# Altium PCB PCB.PcbDoc
Units mm, origin at the board's own origin, x right, y up, seen from the top; angles counter-clockwise.
Board outline 100 x 100 mm, 6 copper layers (Top Layer, Int1 (GND), Int2 (SIG), Int3 (SIG), Int4 (PWR), Bottom Layer), stack 1.51 mm thick; 51 components, 25 nets, 186 pads, 1 vias.
Unrouted connection lines stored in the file: 2.
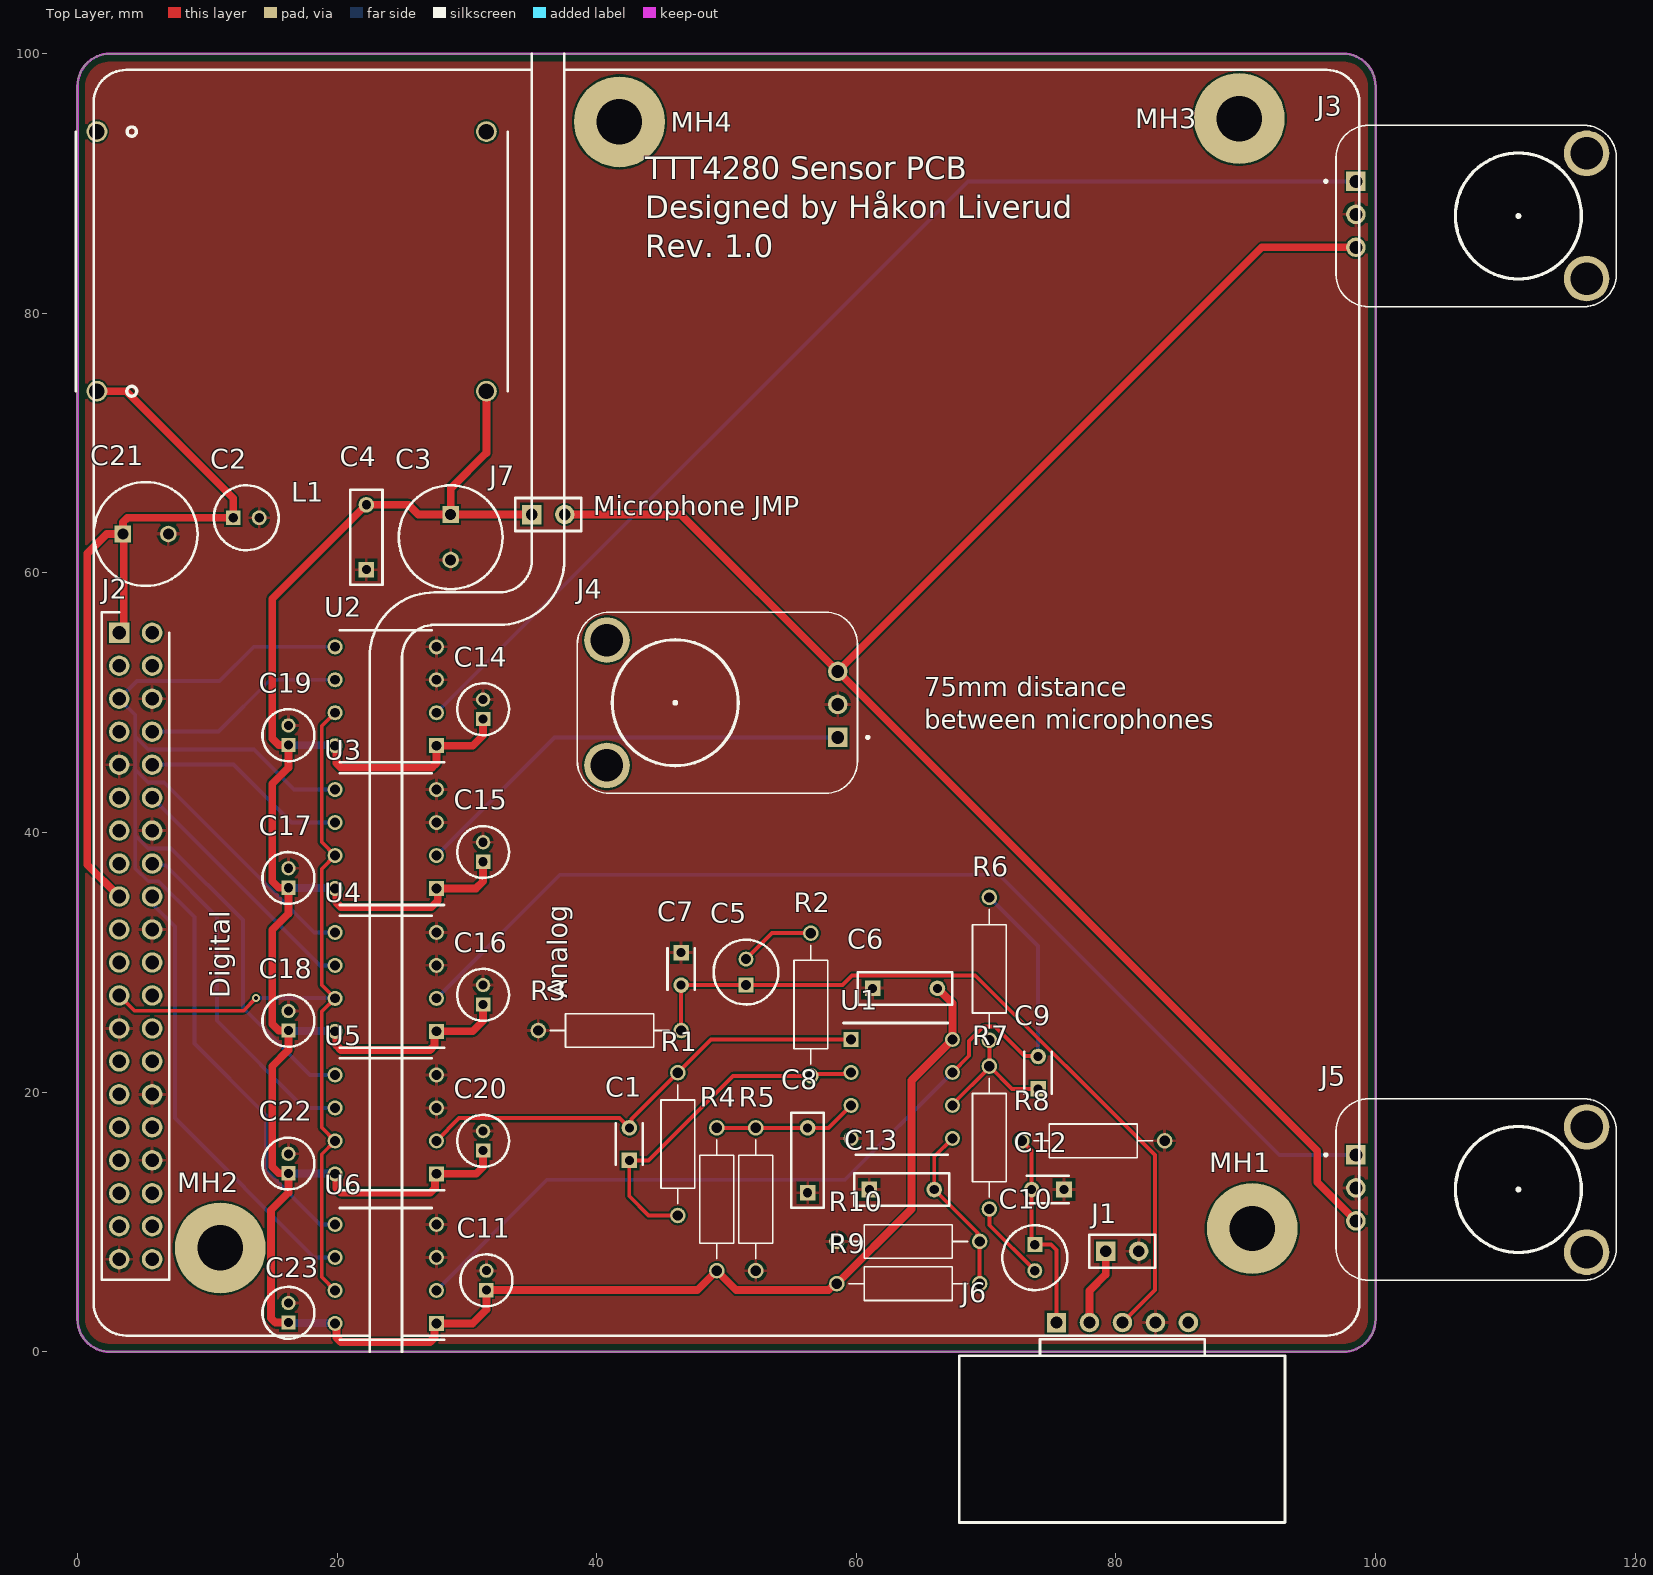
[diagram p0: Top Layer view]
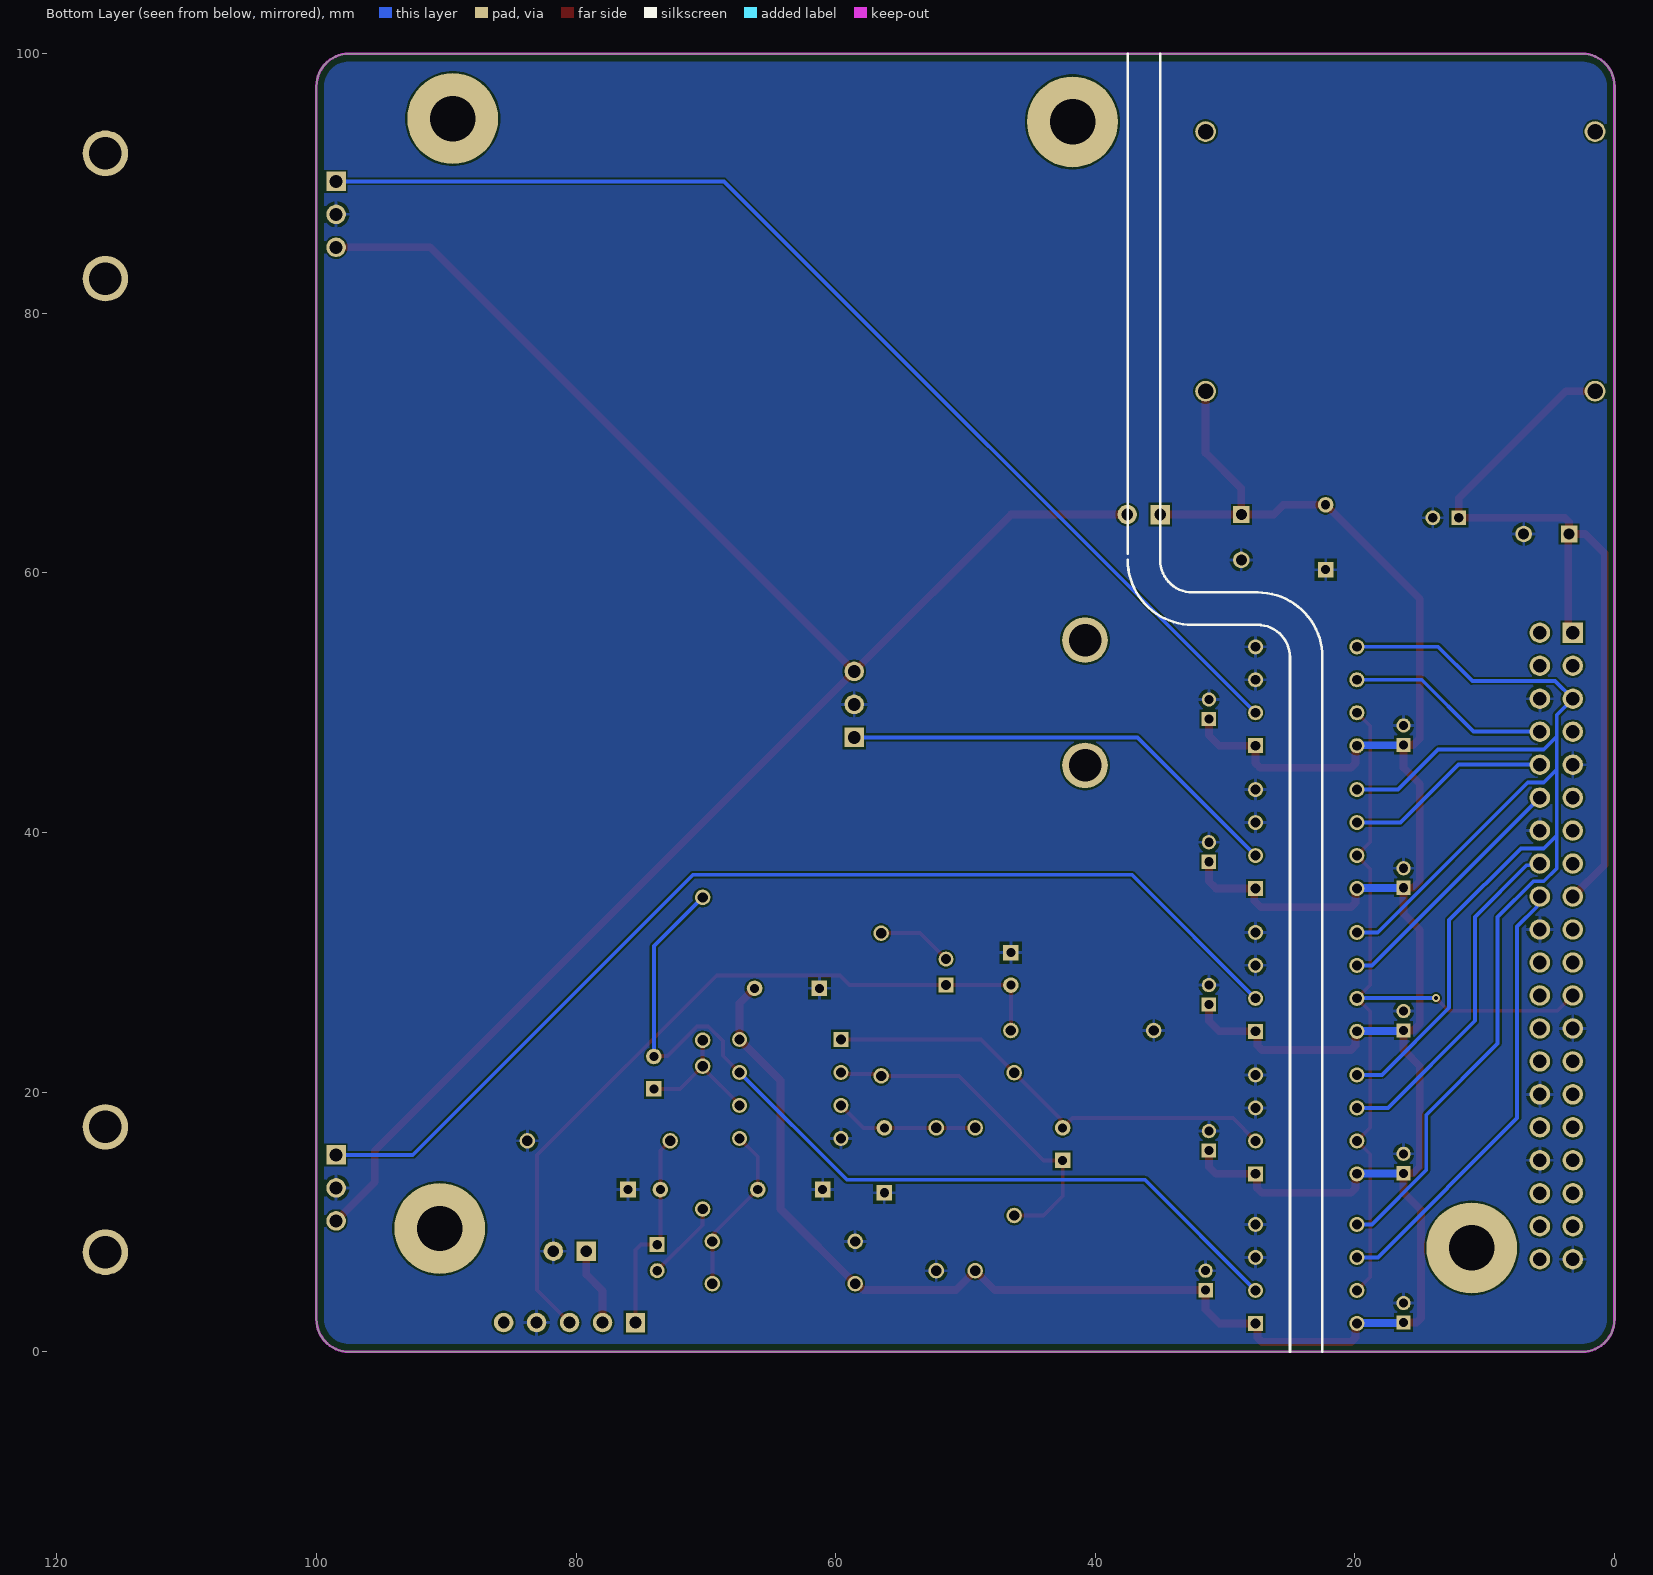
[diagram p1: Bottom Layer view, seen from below]
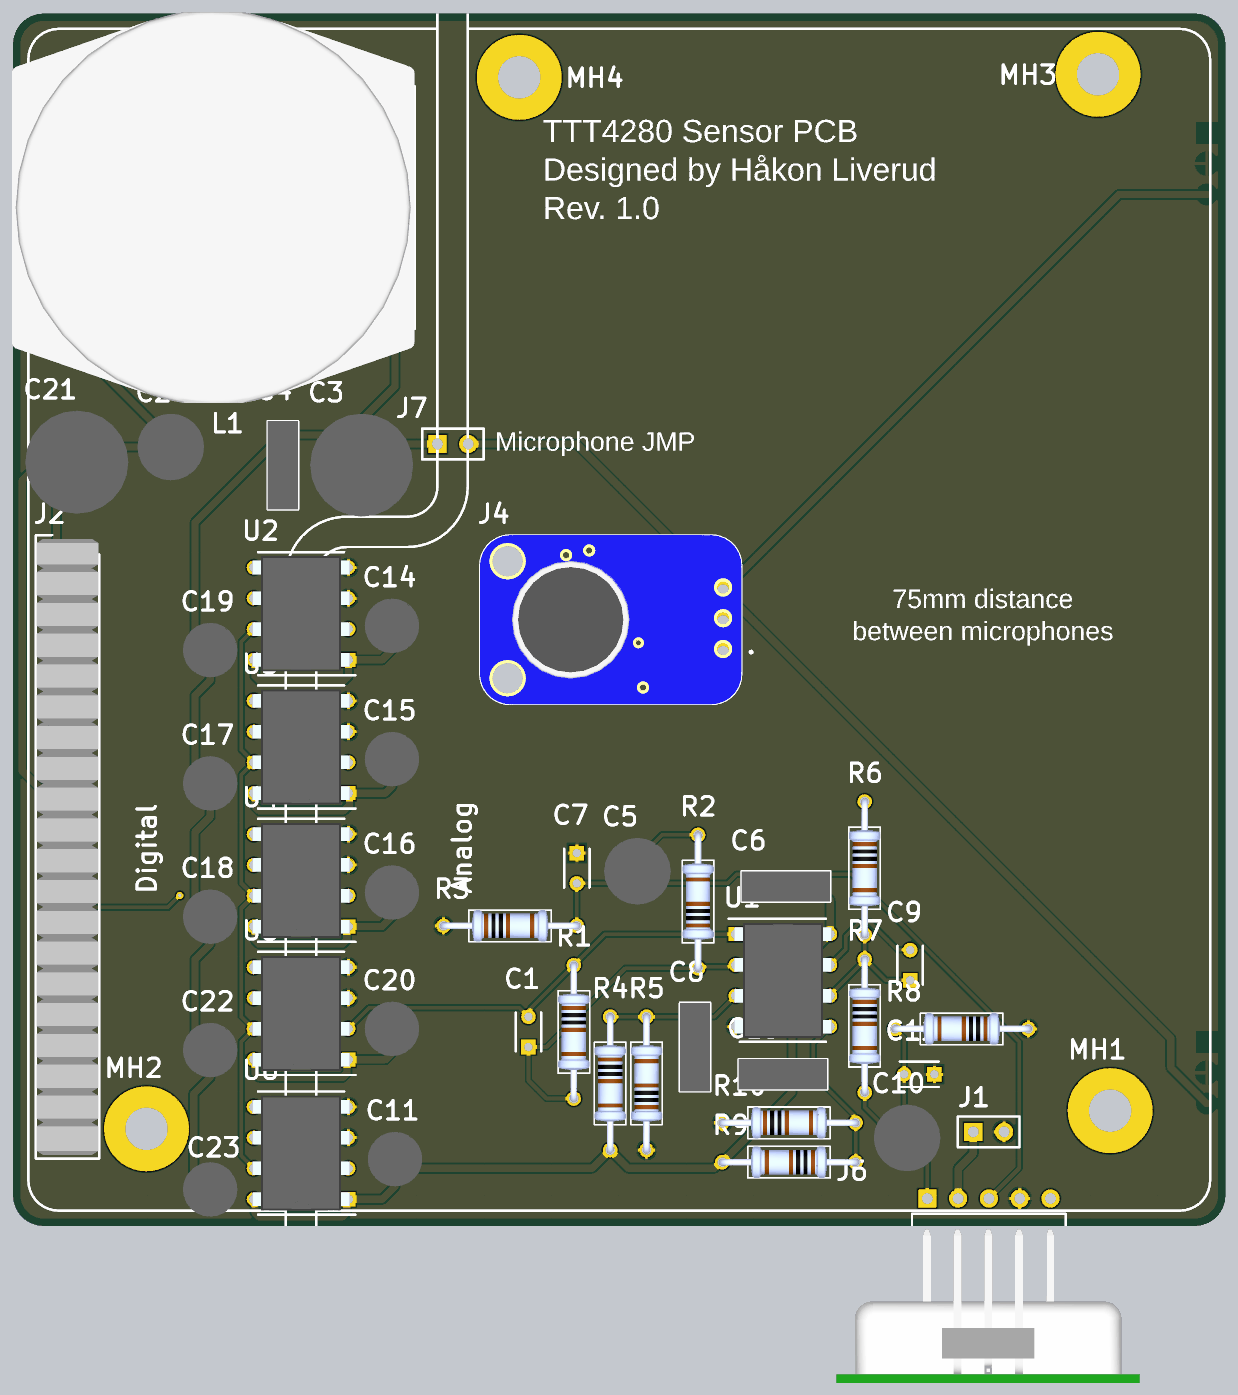
[diagram p2: 3D render of the assembled board from above, using the file's embedded part models]

## Layer stack, top to bottom
Top Solder: solder mask 0.0254, SM-001, Dk 4
Top Layer: signal copper 0.035
Dielectric 2: prepreg 0.24, PP-006, Dk 4.1
Int1 (GND): signal copper 0.035
Dielectric 3: core 0.33, Core-035, Dk 4.7
Int2 (SIG): signal copper 0.035
Dielectric 4: prepreg 0.16, PP-006, Dk 4.1
Int3 (SIG): signal copper 0.035
Dielectric 6: core 0.33, Core-035, Dk 4.7
Int4 (PWR): signal copper 0.035
Dielectric 7: prepreg 0.24, PP-006, Dk 4.1
Bottom Layer: signal copper 0.035
Bottom Solder: solder mask 0.0254, SM-001, Dk 4

## Board outline
0,2.5 0,97.5 cw(c2.5,97.5) 2.5,100 97.5,100 cw(c97.5,97.5) 100,97.5 100,2.5 cw(c97.5,2.5) 97.5,0 2.5,0 cw(c2.5,2.5)

## Design rules (kind name [scope] priority, off if disabled: settings)
BoardOutlineClearance [Not (OnLayer('Top Overlay') Or OnLayer('Bottom Overlay'))] p1: gap=0.6 ignorepadtopadclearanceinfootprint=FALSE except(0: Arc-SplitContinuation Track-SplitContinuation SMDPad-SplitContinuation THPad-SplitContinuation Via-SplitContinuation Fill-SplitContinuation Poly-SplitContinuation Region-SplitContinuation Text-OutlineEdge Text-CavityEdge Text-CutoutEdge Text-SplitBarrior Text-SplitContinuation)
Clearance [All] p1: gap=0.15 ignorepadtopadclearanceinfootprint=FALSE except(0: Arc-Hole Track-Hole SMDPad-Hole THPad-Hole Via-Hole Fill-Hole Poly-Hole Region-Hole Text-Hole)
DiffPairsRouting DiffPairsRouting_1 [(InNet('CAN0L') OR InNet('CAN0H'))] p1: maxlimit=0.254 minlimit=0.254 mostfreqgap=0.254 toplayer_minwidth=0.381 toplayer_maxwidth=0.381 toplayer_prefwidth=0.381 midlayer1_minwidth=0.381 midlayer1_maxwidth=0.381 midlayer1_prefwidth=0.381 midlayer2_minwidth=0.381 midlayer2_maxwidth=0.381 midlayer2_prefwidth=0.381 midlayer3_minwidth=0.381 midlayer3_maxwidth=0.381 midlayer3_prefwidth=0.381 midlayer4_minwidth=0.381 midlayer4_maxwidth=0.381 midlayer4_prefwidth=0.381 bottomlayer_minwidth=0.381 bottomlayer_maxwidth=0.381 bottomlayer_prefwidth=0.381 maxuncoupledlength=12.7
DiffPairsRouting [All] p2: maxlimit=0.254 minlimit=0.15 mostfreqgap=0.2 toplayer_minwidth=0.15 toplayer_maxwidth=1 toplayer_prefwidth=0.2 midlayer1_minwidth=0.15 midlayer1_maxwidth=1 midlayer1_prefwidth=0.2 midlayer2_minwidth=0.15 midlayer2_maxwidth=1 midlayer2_prefwidth=0.2 midlayer3_minwidth=0.15 midlayer3_maxwidth=1 midlayer3_prefwidth=0.2 midlayer4_minwidth=0.15 midlayer4_maxwidth=1 midlayer4_prefwidth=0.2 bottomlayer_minwidth=0.15 bottomlayer_maxwidth=1 bottomlayer_prefwidth=0.2 maxuncoupledlength=12.7
Height [All] p1: minheight=0 maxheight=40 prefheight=12.7
HoleSize [All] p1: absolutevalues=TRUE maxlimit=5.5 minlimit=0.3 maxpercent=80.000 minpercent=20.000
MinimumSolderMaskSliver [All] p1: minsoldermaskwidth=0.1
PolygonConnect [All] p1: connectstyle=Relief reliefconductorwidth=0.254 reliefentries=4 polygonreliefangle="90 Angle" airgapwidth=0.254
RoutingVias [All] p1: holewidth=0.35 width=0.65 viastyle="Through Hole" minholewidth=0.3 minwidth=0.6 maxholewidth=0.7 maxwidth=1.5
SilkToSilkClearance [All] p1: silktosilkclearance=0.07
SolderMaskExpansion [All] p1: expansion=0.1 istentingtop=FALSE
Width [All] p1: maxlimit=5 minlimit=0.15 preferedwidth=0.2 checkconnectedcopper=TRUE
25 further rules are at their usual default settings.

## Components (designator, comment, footprint, x,y, rotation, side; value= is the part's Value field where it differs from the comment)
C1 "???" "CTHT Ceramic" 42.51,14.75 r90 top value=1nF
C2 "100uF" "CTHT 5MM" 12,64.25 r0 top
C3 "470uF" "CTHT 8mm" 28.75,64.5 r270 top
C4 "100nF" "C TDK Film 7.3x2.5x6.5mm" 22.25,60.25 r90 top value=0.1uF
C5 "???" "CTHT 5MM" 51.5,28.25 r90 top
C6 "100nF" "C TDK Film 7.3x2.5x6.5mm" 61.25,28 r0 top value=0.1uF
C7 "1nF" "CTHT Ceramic" 46.5,30.75 r270 top
C8 "100nF" "C TDK Film 7.3x2.5x6.5mm" 56.25,12.25 r90 top value=0.1uF
C9 "???" "CTHT Ceramic" 74,20.25 r90 top value=1nF
C10 "???" "CTHT 5MM" 73.75,8.25 r270 top
C11 "1uF" "CTHT 4MM" 31.5,4.75 r90 top
C12 "1nF" "CTHT Ceramic" 76,12.5 r180 top
C13 "100nF" "C TDK Film 7.3x2.5x6.5mm" 61,12.5 r0 top value=0.1uF
C14 "1uF" "CTHT 4MM" 31.25,48.75 r90 top
C15 "1uF" "CTHT 4MM" 31.25,37.75 r90 top
C16 "1uF" "CTHT 4MM" 31.25,26.75 r90 top
C17 "10uF" "CTHT 4MM" 16.25,35.75 r90 top
C18 "10uF" "CTHT 4MM" 16.25,24.75 r90 top
C19 "10uF" "CTHT 4MM" 16.25,46.75 r90 top
C20 "1uF" "CTHT 4MM" 31.25,15.5 r90 top
C21 "470uF" "CTHT 8mm" 3.5,63 r0 top
C22 "10uF" "CTHT 4MM" 16.25,13.75 r90 top
C23 "10uF" "CTHT 4MM" 16.25,2.25 r90 top
J1 "Header 2" HDR1X2 79.21,7.75 r0 top
J2 "2x20 Header RPI4" HDRV40W87P254_2X20_5093X508X1067P 3.21,55.39 r270 top
J3 "Adafruit MAX4466" MODULE_1063 111,87.5 r270 top
J4 "Adafruit MAX4466" MODULE_1063 46.048,50 r90 top
J5 "Adafruit MAX4466" MODULE_1063 111,12.5 r270 top
J6 "K-LC6" K-LC6 75.42,2.25 r0 top
J7 "Microphone Power Jumper" HDR1X2 35,64.5 r0 top
L1 "100mH Inductor" DKFP-G22G-D5J0 16.5,84 r270 top
MH1 "MountingHole" MountingHole 90.5,9.5 r180 top
MH2 "MountingHole" MountingHole 11,8 r180 top
MH3 "MountingHole" MountingHole 89.5,95 r180 top
MH4 "MountingHole" MountingHole 41.75,94.75 r180 top
R1 "???" RTHT 46.25,16 r270 top value=1K
R2 "???" RTHT 56.5,26.75 r90 top value=1K
R3 "1k" RTHT 41,24.75 r0 top value=1K
R4 "???" RTHT 49.25,11.75 r270 top value=1K
R5 "10k-50k" RTHT 52.25,11.75 r90 top value=1K
R6 "???" RTHT 70.25,29.5 r270 top value=1K
R7 "???" RTHT 70.25,16.5 r270 top value=1K
R8 "1k" RTHT 78.25,16.25 r180 top value=1K
R9 "???" RTHT 64,5.25 r180 top value=1K
R10 "10k-50k" RTHT 64,8.5 r0 top value=1K
U1 "MCP6002" DIP781W56P254L950H533Q8N 63.5,20.25 r0 top
U2 "MCP3201" DIP781W56P254L950H533Q8N 23.75,50.5 r180 top
U3 "MCP3201" DIP781W56P254L950H533Q8N 23.75,39.5 r180 top
U4 "MCP3201" DIP781W56P254L950H533Q8N 23.75,28.5 r180 top
U5 "MCP3201" DIP781W56P254L950H533Q8N 23.75,17.52 r180 top
U6 "MCP3201" DIP781W56P254L950H533Q8N 23.75,6 r180 top

## Footprints (in the part's own frame and the unit in brackets; to place one, negate y for a bottom-side part, rotate by r counter-clockwise, add the part's x,y. Pads: shape width x height; smd on the part's side, far side on the other; paste and mask are expansions set on the pad)
"C TDK Film 7.3x2.5x6.5mm" [mm]
  rect 1.2x1.2 hole 0.7: 1(0,0)
  round 1.2 hole 0.7: 2(5,0)
  silkscreen extent -1.15,-1.25 6.15,1.25, body extent -1.15,-1.25 6.15,1.25, height 6.6
"CTHT 4MM" [mm]
  rect 1.1x1.1 hole 0.7: 1(0,0)
  round 1.1 hole 0.7: 2(1.5,0)
  silkscreen extent -1.25,-2 2.75,2, body extent -1.5,-2.24 3,2.24, height 8
"CTHT 5MM" [mm]
  rect 1.15x1.15 hole 0.75: 1(0,0)
  round 1.15 hole 0.75: 2(2,0)
  silkscreen extent -1.5,-2.5 3.5,2.5, body extent -1.74,-2.75 3.75,2.75, height 12
"CTHT 8mm" [mm]
  rect 1.275x1.275 hole 0.85: 1(0,0)
  round 1.275 hole 0.85: 2(3.5,0)
  silkscreen extent -2.25,-4 5.75,4, body extent -2.49,-4.25 6,4.25, height 12.5
"CTHT Ceramic" [mm]
  rect 1.2x1.2 hole 0.7: 1(0,0)
  round 1.2 hole 0.7: 2(2.5,0)
  silkscreen extent -0.35,-1.05 2.85,1.05, body extent -1.1,-1.25 3.6,1.25, height 7.35
DIP781W56P254L950H533Q8N [mm]
  rect 1.159x1.159 hole 0.759: 1(-3.905,3.81)
  round 1.159 hole 0.759: 2(-3.905,1.27) 3(-3.905,-1.27) 4(-3.905,-3.81) 5(3.905,-3.81) 6(3.905,-1.27) 7(3.905,1.27) 8(3.905,3.81)
  silkscreen extent -4.48,-5.08 3.56,5.08, body extent -4.05,-4.75 4.05,4.75, height 5.33
DKFP-G22G-D5J0 [mm]
  round 1.6 hole 1.2: 1(10,-15) 2(10,15) 3(-10,-15) 4(-10,15)
  silkscreen extent -10.36,-16.64 10.38,16.64, body extent -16.1,-16.6 16.1,16.6, height 16.8
HDR1X2 [mm] "Connector; Header; 2 Position"
  rect 1.5x1.5 hole 0.9: 1(0,0)
  round 1.5 hole 0.9: 2(2.54,0)
  silkscreen extent -1.27,-1.27 3.81,1.27
HDRV40W87P254_2X20_5093X508X1067P [mm]
  rect 1.575x1.575 hole 1.05: 1(0,0)
  round 1.575 hole 1.05: 2(0,2.54) 3(2.54,0) 4(2.54,2.54) 5(5.08,0) 6(5.08,2.54) 7(7.62,0) 8(7.62,2.54) 9(10.16,0) 10(10.16,2.54) 11(12.7,0) 12(12.7,2.54) 13(15.24,0) 14(15.24,2.54) 15(17.78,0) 16(17.78,2.54) 17(20.32,0) 18(20.32,2.54) 19(22.86,0) 20(22.86,2.54) 21(25.4,0) 22(25.4,2.54) 23(27.94,0) 24(27.94,2.54) 25(30.48,0) 26(30.48,2.54) 27(33.02,0) 28(33.02,2.54) 29(35.56,0) 30(35.56,2.54) 31(38.1,0) 32(38.1,2.54) 33(40.64,0) 34(40.64,2.54) 35(43.18,0) 36(43.18,2.54) 37(45.72,0) 38(45.72,2.54) 39(48.26,0) 40(48.26,2.54)
  silkscreen extent -1.59,-1.34 49.85,3.88, body extent -1.27,-1.27 49.53,3.81, height 10.32
K-LC6 [mm] "Radar 5 pin"
  rect 1.5x1.5 hole 0.9: 1(0,0)
  round 1.5 hole 0.9: 2(2.54,0) 3(5.08,0) 4(7.62,0) 5(10.16,0)
  silkscreen extent -7.5,-15.4 17.6,-1.27, body extent -7.5,-15.24 17.52,-2.55, height 65.35
MODULE_1063 [mm]
  rect 1.508x1.508 hole 1: 1(-2.667,-12.521)
  round 1.508 hole 1: 2(-0.127,-12.521) 3(2.413,-12.521)
  round 3.516 hole 2.5: S1(-4.826,5.259) S2(4.826,5.259)
  silkscreen extent -6.99,-14.93 6.99,7.54, body extent -6.99,-14.05 6.99,7.54, height 9.14
MountingHole [mm]
  round 7 hole 3.5: 1(0,0)
RTHT [mm]
  round 1.2 hole 0.8: 1(-5.5,0) 2(5.5,0)
  silkscreen extent -4.58,-1.3 4.58,1.3, body extent -5.77,-1.29 5.77,1.29, height 2.6

## Part data
C1 C7 C9 C12: library part "1nF Ceramic", "1nF Ceramic Cap"
C2 C5 C10: library part "100uF 5mm THT", "100uF 5mm THT Cap"
C3: library part "470uF 8mm THT", "0.8pF 8mm THT Cap"
C4 C6 C8 C13: library part "100nF Film", "100nF Film Cap"
C11 C14 C15 C16 C20: library part "1uF 4mm THT", "1uF 4mm THT Cap"
C17 C18 C19 C22 C23: library part "10uF 4mm THT", "10uF 4mm THT Cap"
C21: library part "470uF 8mm THT", "100uF 8mm THT Cap"
J1: "Header, 2-Pin", LatestRevisionDate=17-Jul-2002, LatestRevisionNote="Re-released for DXP Platform.", Publisher="Altium Limited"
J2: library part 2222_1, "GPIO MALE HEADER RASPBERRY PI"
J3 J4 J5: library part 1063, "Microphone Pre-Amp Audio Evaluation Board", Package=None, Availability=Unavailable, MF="{'manufacturer': u'Adafruit'}", MP=1063, Price=None
J6: "Radar Transceiver Module 24.05GHz ~ 24.25GHz Integrated, Ceramic Patch Through Hole", LatestRevisionDate=17-Jul-2002, LatestRevisionNote="Re-released for DXP Platform.", Publisher="Altium Limited"
J7: library part "Header 2", "Header, 2-Pin", LatestRevisionDate=17-Jul-2002, LatestRevisionNote="Re-released for DXP Platform.", Publisher="Altium Limited"
L1: library part DKFP-G22G-D5J0, "Common Mode Chokes / Filters DKFP COMP.CHOKE THT P O 0.5A 2X100mH"
MH1 MH2 MH3 MH4: "3.5mm mounting hole"
R1 R2 R3 R4 R5 R6 R7 R8 R9 R10: library part "1k THT", "1k THT Res"
U1: library part MCP6022-P-8, "Operational Amplifiers - Op Amps Dual 1.8V 1MHz"
U2 U3 U4 U5 U6: library part MCP3201-BI_P, "12-Bit, 100kSPS, Single Channel ADC", Arrow Part Number=MCP3201-BI/P, Manufacturer_Name=Microchip, Mouser Part Number=579-MCP3201-BI/P, Arrow Price/Stock=https://www.arrow.com/en/products/mcp3201-bip/microchip-technology?region=nac, Datasheet Link=http://uk.rs-online.com/web/p/products/1654833, Height=5.334mm, Manufacturer_Part_Number=MCP3201-BI/P, Mouser Price/Stock=https://www.mouser.co.uk/ProductDetail/Microchip-Technology-Atmel/MCP3201-BI-P?qs=Vn0zuzr35GGoo291EIbsHA%3D%3D

## Via types
v1: diameter 0.6, hole 0.3, Top Layer to Bottom Layer, 1 vias

## Nets (pads, with @x,y where several pads share a name; then routed paths per layer and width w, separated by ;. In a path a pad name is that pad's centre, name@x,y a point inside that pad or via, vN(x,y) a via of type N, cw(c..) or ccw(c..) an arc to the next point about the centre after c; other vN are vias at no path point)
0V: C2.2 C3.2 C4.1 C6.1 C7.1 C8.1 C11.2 C12.1 C13.1 C14.2 C15.2 C16.2 C17.2 C18.2 C19.2 C20.2 C21.2 C22.2 C23.2 J1.2 J2.6 J2.9 J2.14 J2.20 J2.25 J2.30 J2.34 J2.39 J3.2 J4.2 J5.2 J6.4 R3.1 R5.1 R8.1 R10.1 U1.4 U2.3 U2.4 U3.3 U3.4 U4.3 U4.4 U5.3 U5.4 U6.3 U6.4
3V3: C3.1 C4.2 C6.2 C11.1 C14.1 C15.1 C16.1 C17.1 C18.1 C19.1 C20.1 C22.1 C23.1 J7.1 L1.2 R4.2 R9.2 U1.8 U2.1 U2.8 U3.1 U3.8 U4.1 U4.8 U5.1 U5.8 U6.1 U6.8 | length 248.7
  Top Layer w0.6: C23.1 15.251,2.25 14.9,2.601 14.9,10.9 16.25,12.25 C22.1 ; C22.1@16.27,13.73 C22.1 ; U6.8@19.785,2.25 U6.8 19.952,2.083 19.952,1.101 20.303,0.75 27.16,0.75 27.512,1.101 27.512,2.047 U6.1 30.44,2.19 31.5,3.25 C11.1 47.75,4.75 R4.2 50.75,4.75 57.849,4.75 58.349,5.25 R9.2 ; U2.8@19.785,46.75 U2.8 19.952,46.583 19.952,45.351 20.303,45 27.304,45 27.655,45.351 U2.1 30.44,46.69 31.25,47.5 C14.1 ; U4.8@19.815,24.72 U4.8 19.952,24.583 19.952,23.601 20.303,23.25 27.16,23.25 27.512,23.601 27.512,24.547 U4.1 30.44,24.69 31.25,25.5 C16.1 ; U3.8@19.815,35.72 U3.8 19.952,35.583 19.952,34.601 20.303,34.25 27.25,34.25 27.75,34.75 27.75,35.595 U3.1 30.69,35.69 31.25,36.25 C15.1 ; U5.8@19.825,13.73 U5.8 19.952,13.603 19.952,12.601 20.303,12.25 27.18,12.25 27.532,12.601 27.532,13.587 U5.1 30.71,13.71 31.25,14.25 C20.1 ; L1.2 31.5,69.25 28.75,66.5 C3.1 ; J7.1 C3.1 ; R9.2@58.385,5.135 64.25,11 64.25,20.905 U1.8 67.405,26.845 C6.2 ; C22.1 15.5,13.75 15,14.25 15,22 16.25,23.25 C18.1 15.5,24.75 15,25.25 15,32.5 16.25,33.75 C17.1 15.5,35.75 15,36.25 15,43.75 16.25,45 C19.1 15.5,46.75 15,47.25 15,58 C4.2 25.5,65.25 26.25,64.5 C3.1
  Bottom Layer w0.6: C23.1 16.28,2.22 19.815,2.22 U6.8 ; C22.1 16.27,13.73 19.825,13.73 U5.8 ; C18.1 16.28,24.72 19.815,24.72 U4.8 ; C17.1 16.28,35.72 19.815,35.72 U3.8 ; C19.1 16.28,46.72 19.815,46.72 U2.8
3V3_M: J3.3 J4.3 J5.3 J7.2 | length 138.3
  Top Layer w0.6: J7.2 46.482,64.5 J4.3 ; J5.3 95.5,13.066 95.5,15.482 J4.3 ; J3.3 91.243,85.087 J4.3
3V3_Unfiltered: C2.1 C21.1 J2.1 J2.17 L1.1 | length 63.6
  Top Layer w0.6: L1.1 3.75,74 12,65.75 C2.1 3.851,64.25 3.5,63.899 C21.1 ; J2.17 0.75,37.53 0.75,61.5 2.25,63 C21.1 ; J2.1 3.564,55.744 3.564,63 C21.1
5V: J1.1 J6.2 | length 6
  Top Layer w0.6: J6.2 77.96,4.71 79.21,5.96 J1.1
C\S\: J2.5 U2.5 U3.5 U4.5 U5.5 U6.5 | length 131.5
  Bottom Layer w0.3: U6.5 18.69,9.81 14.5,14 14.5,18.25 9,23.75 9,33.482 6.237,36.245 5.453,36.245 4.454,37.245 4.454,39.785 ; U5.5 17.92,21.33 12.75,26.5 12.75,33.25 7.215,38.785 5.453,38.785 4.454,39.785 ; U4.5 18.236,32.31 6.681,43.865 5.453,43.865 4.454,44.865 ; U3.5 16.69,43.31 13.595,46.405 5.453,46.405 4.454,47.405 ; U2.5 13.584,54.31 10.949,51.675 4.575,51.675 J2.5 4.454,49.066 4.454,47.405 ; 4.454,39.785 4.454,44.865 ; 4.454,44.865 4.454,47.405
CLK: J2.23 U2.7 U3.7 U4.7 U5.7 U6.7 | length 65.4
  Top Layer w0.3: J2.23 4.385,26.275 12.775,26.275 v1(13.75,27.25) ; U6.7 18.815,5.76 18.815,15.22 U5.7 18.815,17.279 18.815,26.2 U4.7 ; U4.7 18.815,28.261 18.815,37.2 U3.7 18.815,39.259 18.815,48.2 U2.7
  Bottom Layer w0.3: v1(13.75,27.25) 19.825,27.25 U4.7
DATA1: J2.8 U4.6 | length 15.8
  Bottom Layer w0.3: J2.8 10.854,47.77 14.854,51.77 19.845,51.77
DATA2: J2.10 U3.6 | length 15.9
  Bottom Layer w0.3: J2.10 12.02,45.23 16.48,40.77 U3.6
DATA3: J2.12 U2.6 | length 19.4
  Bottom Layer w0.3: J2.12 18.67,29.77 19.845,29.77
DATA4: J2.16 U5.6 | length 26.6
  Bottom Layer w0.3: J2.16 5.88,37.48 6.77,37.48 10.75,33.5 10.75,25.5 17.46,18.79 U5.6
DATA5: J2.18 U6.6 | length 34.6
  Bottom Layer w0.3: J2.18 5.994,34.826 5.994,34.256 7.5,32.75 7.5,18 18.23,7.27 U6.6
IF_Filtered_I: C1.2 R1.1 U1.1 U5.2 | length 36.1
  Top Layer w0.3: U5.2 29.405,18 41.76,18 42.374,17.386 C1.2 42.682,17.422 42.682,17.932 48.81,24.06 U1.1
IF_Filtered_Q: C9.2 R6.1 U1.7 U6.2 | length 70.2
  Top Layer w0.3: U1.7 68.692,22.807 68.692,23.927 69.815,25.05 70.685,25.05 72.95,22.785 73.965,22.785 C9.2
  Bottom Layer w0.3: U6.2 36.175,13.25 59.135,13.25 U1.7 ; R6.1 74,31.25 C9.2
IF_Out_I: C5.1 C7.2 J6.3 R3.2 | length 60
  Top Layer w0.3: R3.2 C7.2 C5.1 58.92,28.25 59.67,29 69.164,29 83,15.164 83,4.75 J6.3
IF_Out_Q: C10.1 C12.2 J6.1 R8.2 | length 15.8
  Top Layer w0.3: R8.2 73.5,15.5 C12.2 73.5,8.5 C10.1 75,8.25 75.42,7.83 J6.1
MIC1: J5.1 U4.2 | length 83.7
  Bottom Layer w0.3: U4.2 37.175,36.75 71,36.75 92.583,15.167 J5.1
MIC2: J4.1 U3.2 | length 34.7
  Bottom Layer w0.3: U3.2 36.758,47.333 J4.1
MIC3: J3.1 U2.2 | length 87.8
  Bottom Layer w0.3: U2.2 68.592,90.167 J3.1
NetC1_1: C1.1 R1.2 R2.1 U1.2 | length 27
  Top Layer w0.3: R1.2 44,10.5 42.51,11.99 C1.1 44,14.75 50.5,21.25 R2.1 56.635,21.385 59.46,21.385 U1.2
NetC5_2: C5.2 R2.2 | length 5.8
  Top Layer w0.3: C5.2 53.5,32.25 R2.2
NetC8_2: C8.2 R4.1 R5.2 U1.3 | length 11.1
  Top Layer w0.3: R4.1 R5.2 C8.2 57.865,17.25 U1.3
NetC9_1: C9.1 R6.2 R7.1 U1.6 | length 10.7
  Top Layer w0.3: U1.6 67.405,19.067 70.25,21.912 R7.1 ; R6.2 R7.1 ; C9.1 72,20.25 R7.1
NetC10_2: C10.2 R7.2 | length 6.2
  Top Layer w0.3: R7.2 70.25,9.75 C10.2
NetC13_2: C13.2 R9.1 R10.2 U1.5 | length 13.2
  Top Layer w0.3: U1.5 66,15.035 C13.2 69.328,9.172 69.328,8.672 R10.2 R9.1
pads on no net: J2.2 J2.3 J2.4 J2.7 J2.11 J2.13 J2.15 J2.19 J2.21 J2.22 J2.24 J2.26 J2.27 J2.28 J2.29 J2.31 J2.32 J2.33 J2.35 J2.36 J2.37 J2.38 J2.40 J3.S1 J3.S2 J4.S1 J4.S2 J5.S1 J5.S2 J6.5 L1.3 L1.4 MH1.1 MH2.1 MH3.1 MH4.1

## Polygon pours and split planes (outlines as drawn)
0V on Bottom Layer "0V_L06_P000" (solid, pour order 0): 0,0 0,100 100,100 100,0
0V on Top Layer "0V_L01_P001" (solid, pour order 1): 0,0 0,100 100,100 100,0

## Keep-outs
Keep-Out Layer:
  the board outline again, w0.2

## Silkscreen, mask and mechanical layers (free items; w line width, h text height)
Top Overlay:
  lines w0.2: 22.5,0 22.5,53.5 cw(c27.5,53.5) 27.5,58.5 32.5,58.5 ccw(c32.5,61) 35,61 35,100 ; 22.5,1.25 3.75,1.25 cw(c3.75,3.75) 1.25,3.75 1.25,96.25 cw(c3.75,96.25) 3.75,98.75 35,98.75 ; 25,0 25,53.5 cw(c27.5,53.5) 27.5,56 32.5,56 ccw(c32.5,61) 37.5,61 37.5,100 ; 25,1.25 96.25,1.25 ccw(c96.25,3.75) 98.75,3.75 98.75,96.25 ccw(c96.25,96.25) 96.25,98.75 37.5,98.75
  text "TTT4280 Sensor PCB / Designed by Håkon Liverud / Rev. 1.0" at 43.75,83.75 h3
  text "Microphone JMP" at 39.75,63.945 h2.5
  text "75mm distance / between microphones" at 65.25,47.511 h2.5
  text "Digital" at 11.738,27.254 h1.52 r90
  text "Analog" at 37.738,27.254 h1.52 r90
Bottom Overlay:
  lines w0.2: 22.5,0 22.5,53.5 cw(c27.5,53.5) 27.5,58.5 32.5,58.5 ccw(c32.5,61) 35,61 35,100 ; 25,0 25,53.5 cw(c27.5,53.5) 27.5,56 32.5,56 ccw(c32.5,61) 37.5,61 ; 37.5,61.5 37.5,100
Board Outline:
  lines w0.1: 0,0 100,0 100,100 0,100 0,0